# Altium PCB TP-SENSOR-15x10-CH-R01.PcbDoc (part 1 of 2)
Units mm, origin at the board's own origin, x right, y up, seen from the top; angles counter-clockwise.
Board outline 129.4 x 79.4 mm, 2 copper layers (Top Layer, Bottom Layer), stack 0.98 mm thick; 26 components, 26 nets, 61 pads, 358 vias.
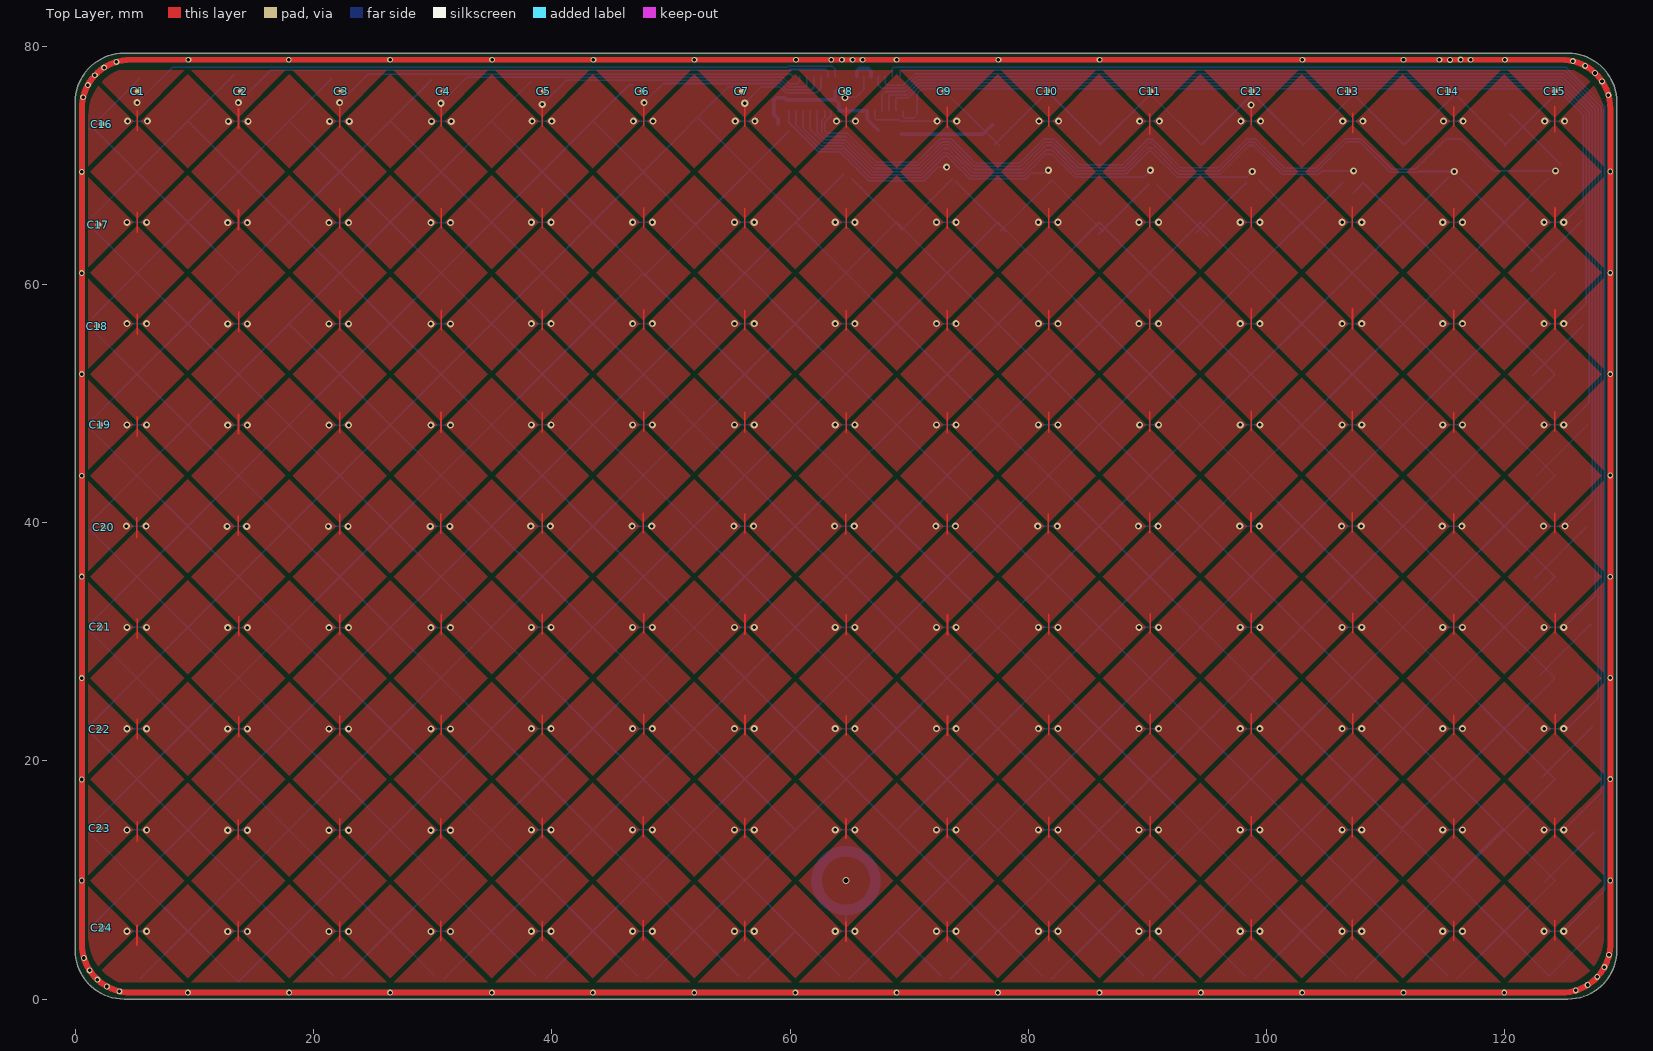
[diagram p0: Top Layer view]
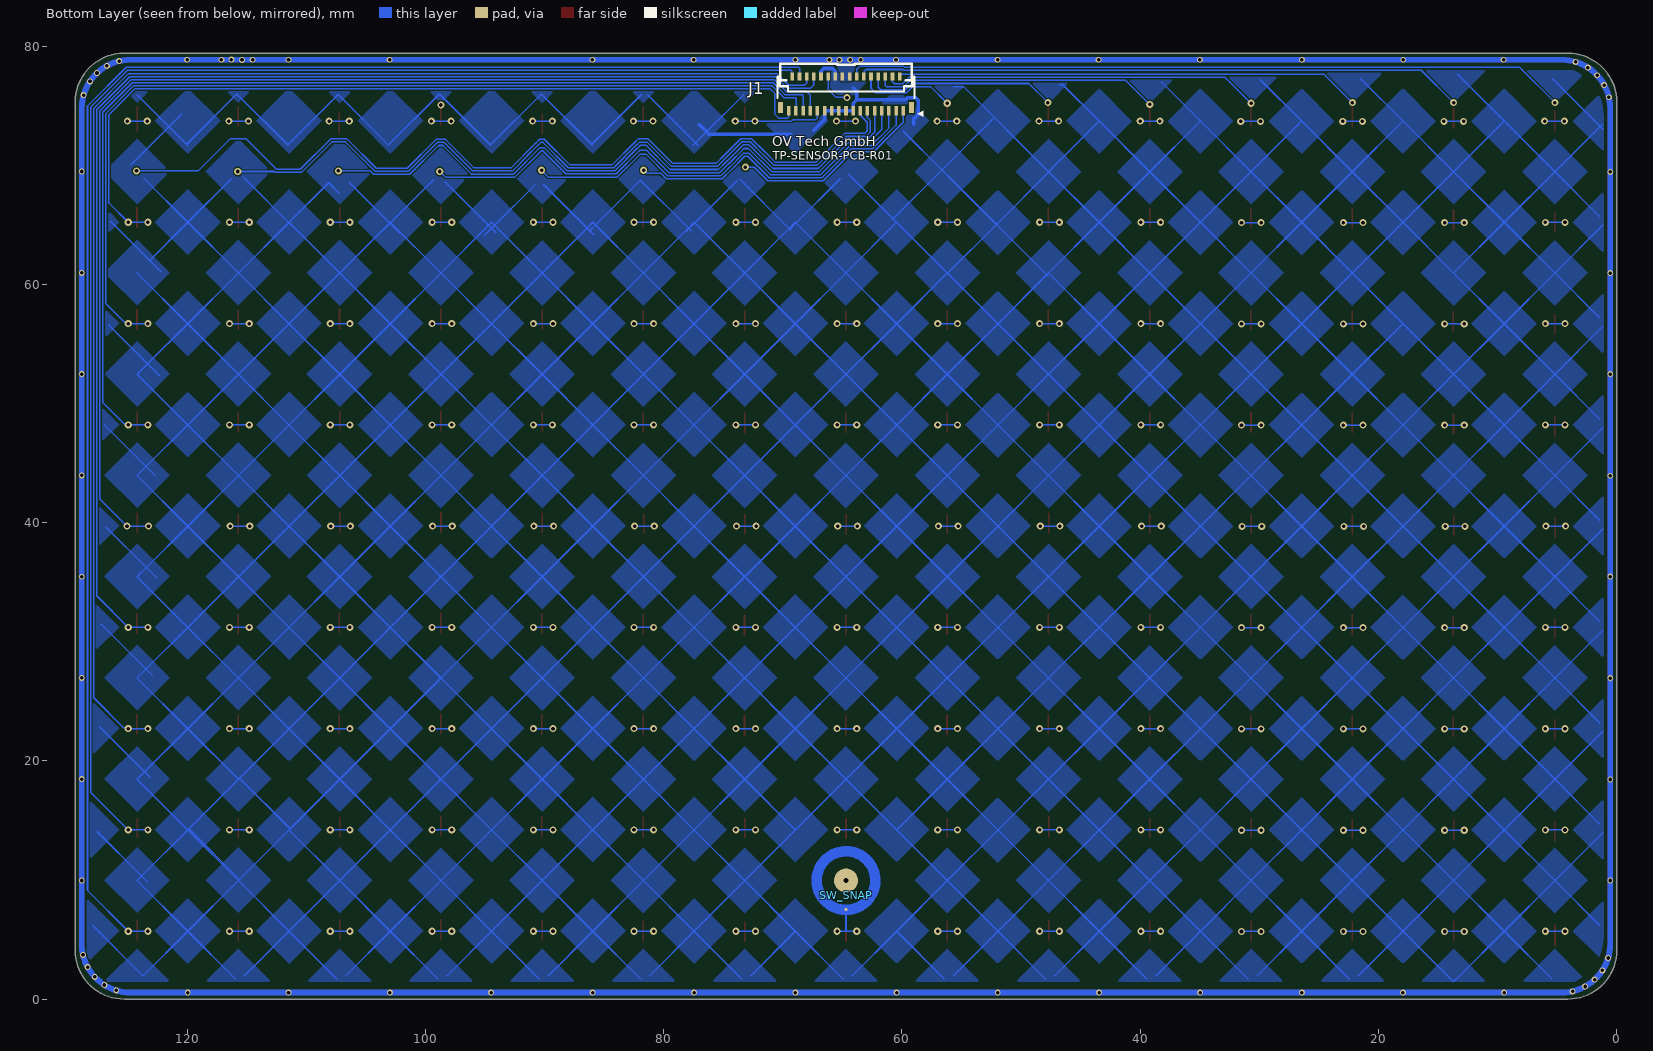
[diagram p1: Bottom Layer view, seen from below]

## Layer stack, top to bottom
Top Solder: solder mask 0.01, Solder Resist, Dk 3.8
Top Layer: signal copper 0.035
Core: core 0.91, 1.5mm 1/1OZ with copper(double-sided), Dk 4.6
Bottom Layer: signal copper 0.035
Bottom Solder: solder mask 0.01, Solder Resist, Dk 3.8

## Board outline
0,4.1 0,75.3 cw(c4.1,75.3) 4.1,79.4 125.3,79.4 cw(c125.3,75.3) 129.4,75.3 129.4,4.1 cw(c125.3,4.1) 125.3,0 4.1,0 cw(c4.1,4.1)

## Design rules (kind name [scope] priority, off if disabled: settings)
BoardOutlineClearance [All] p1: gap=0.289 ignorepadtopadclearanceinfootprint=FALSE
Clearance [All] p1: gap=0.127 ignorepadtopadclearanceinfootprint=TRUE except(0.15: SMDPad-Text THPad-Text Via-Text Fill-Text Poly-Text Region-Text Text-Text Text-Hole; 0.154: Arc-Via Track-Via SMDPad-Via; 0.2: Arc-SMDPad Arc-THPad Arc-Hole Track-SMDPad Track-THPad Track-Hole SMDPad-Hole THPad-Hole)
HoleSize HoleSize_Via [IsVia] p1: absolutevalues=TRUE maxlimit=6.3 minlimit=0.3 maxpercent=80.000 minpercent=20.000
HoleSize HoleSize_Pad [IsPad] p2: absolutevalues=TRUE maxlimit=6.3 minlimit=0.4 maxpercent=80.000 minpercent=20.000
HoleSize HoleSize_General [All] p3: absolutevalues=TRUE maxlimit=6.3 minlimit=0.3 maxpercent=80.000 minpercent=20.000
HoleToHoleClearance HoleToHoleClearance_Via [isVia] p1: gap=0.254 allowstackedmicrovias=TRUE
HoleToHoleClearance HoleToHoleClearance_General [All] p2: gap=0.5 allowstackedmicrovias=TRUE
MinimumAnnularRing MinimumAnnularRing_Pad [IsPad] p1: minimumring=0.25
MinimumAnnularRing MinimumAnnularRing_Via [IsVia] p2: minimumring=0.1
MinimumAnnularRing MinimumAnnularRing_General [not isVia] p3: minimumring=0.2
MinimumSolderMaskSliver [All] p1: minsoldermaskwidth=0.04
PolygonConnect [All] p1: connectstyle=Direct reliefconductorwidth=0.254 reliefentries=4 polygonreliefangle="90 Angle" airgapwidth=0.254
RoutingVias [All] p1: holewidth=0.3 width=0.5 viastyle="Through Hole" minholewidth=0.3 minwidth=0.5 maxholewidth=6.3 maxwidth=6.8
ShortCircuit ShortCircuit_inhibited [InPadClass(' Diamond Pads')] p1: allowed=TRUE
ShortCircuit ShortCircuit_1 [All] p2: allowed=FALSE
SilkToSilkClearance [All] p1: silktosilkclearance=0.15
SilkToSolderMaskClearance [IsPad] p1: minsilkscreentomaskgap=0.15 clearancetoexposedcopper=TRUE
SolderMaskExpansion [All] p1: expansion=0.038 istentingtop=FALSE
SupplyNets "Schematic Supply Nets_1" [InNet('GND')] p1: voltage=0.000
SupplyNets "Schematic Supply Nets" [InNet('EMI-GND')] p2: voltage=0.000
Width [All] p1: maxlimit=10 minlimit=0.127 preferedwidth=0.2
24 further rules are at their usual default settings.

## Components (designator, comment, footprint, x,y, rotation, side; value= is the part's Value field where it differs from the comment)
C1 "CAP_TRACKPAD_TX_CLM" CAP_TRACKPAD_TX_CLM 5.25,76.2 r0 top
C2 "CAP_TRACKPAD_TX_CLM" CAP_TRACKPAD_TX_CLM 13.9,76.2 r0 top
C3 "CAP_TRACKPAD_TX_CLM" CAP_TRACKPAD_TX_CLM 22.35,76.2 r0 top
C4 "CAP_TRACKPAD_TX_CLM" CAP_TRACKPAD_TX_CLM 30.9,76.2 r0 top
C5 "CAP_TRACKPAD_TX_CLM" CAP_TRACKPAD_TX_CLM 39.35,76.2 r0 top
C6 "CAP_TRACKPAD_TX_CLM" CAP_TRACKPAD_TX_CLM 47.6,76.2 r0 top
C7 "CAP_TRACKPAD_TX_CLM" CAP_TRACKPAD_TX_CLM 55.95,76.2 r0 top
C8 "CAP_TRACKPAD_TX_CLM" CAP_TRACKPAD_TX_CLM 64.7,76.2 r0 top
C9 "CAP_TRACKPAD_TX_CLM" CAP_TRACKPAD_TX_CLM 72.95,76.2 r0 top
C10 "CAP_TRACKPAD_TX_CLM" CAP_TRACKPAD_TX_CLM 81.6,76.2 r90 top
C11 "CAP_TRACKPAD_TX_CLM" CAP_TRACKPAD_TX_CLM 90.25,76.2 r90 top
C12 "CAP_TRACKPAD_TX_CLM" CAP_TRACKPAD_TX_CLM 98.75,76.2 r90 top
C13 "CAP_TRACKPAD_TX_CLM" CAP_TRACKPAD_TX_CLM 106.85,76.2 r90 top
C14 "CAP_TRACKPAD_TX_CLM" CAP_TRACKPAD_TX_CLM 115.25,76.2 r90 top
C15 "CAP_TRACKPAD_TX_CLM" CAP_TRACKPAD_TX_CLM 124.2,76.2 r90 top
C16 "CAP_TRACKPAD_RX_ROW" CAP_TRACKPAD_RX_ROW 2.25,73.45 r180 top
C17 "CAP_TRACKPAD_RX_ROW" CAP_TRACKPAD_RX_ROW 1.95,65 r180 top
C18 "CAP_TRACKPAD_RX_ROW" CAP_TRACKPAD_RX_ROW 1.85,56.5 r180 top
C19 "CAP_TRACKPAD_RX_ROW" CAP_TRACKPAD_RX_ROW 2.1,48.2 r180 top
C20 "CAP_TRACKPAD_RX_ROW" CAP_TRACKPAD_RX_ROW 2.4,39.6 r180 top
C21 "CAP_TRACKPAD_RX_ROW" CAP_TRACKPAD_RX_ROW 2.1,31.25 r180 top
C22 "CAP_TRACKPAD_RX_ROW" CAP_TRACKPAD_RX_ROW 2.05,22.65 r180 top
C23 "CAP_TRACKPAD_RX_ROW" CAP_TRACKPAD_RX_ROW 2.05,14.35 r180 top
C24 "CAP_TRACKPAD_RX_ROW" CAP_TRACKPAD_RX_ROW 2.25,6 r180 top
J1 "FH35C-33S-0.3SHW" "FFC 33pol 0.3mm FH35C-33S-0.3SHW" 64.7,76.05 r180 bottom
SW_SNAP "RCG05200N" SNAPDOME_RCG05200N 64.7,9.954 r180 bottom

## Footprints (in the part's own frame and the unit in brackets; to place one, negate y for a bottom-side part, rotate by r counter-clockwise, add the part's x,y. Pads: shape width x height; smd on the part's side, far side on the other; paste and mask are expansions set on the pad)
CAP_TRACKPAD_RX_ROW [mm]
  round 0.5 smd mask+0: RX_ROW(0,0)
CAP_TRACKPAD_TX_CLM [mm]
  round 0.5 smd mask+0: TX_CLM(0,0)
"FFC 33pol 0.3mm FH35C-33S-0.3SHW" [mm] "FFC 33pol 0.3mm FH35C-33S-0.3SHW"
  rect 0.3x0.8 smd: 1(4.8,-1.484) 3(4.2,-1.484) 5(3.6,-1.484) 7(3,-1.484) 9(2.4,-1.484) 11(1.8,-1.484) 13(1.2,-1.484) 15(0.6,-1.484) 17(0,-1.484) 19(-0.6,-1.484) 21(-1.2,-1.484) 23(-1.8,-1.484) 25(-2.4,-1.484) 27(-3,-1.484) 29(-3.6,-1.484) 31(-4.2,-1.484) 33(-4.8,-1.484)
  rect 0.3x0.65 smd: 2(4.5,1.391) 4(3.9,1.391) 6(3.3,1.391) 8(2.7,1.391) 10(2.1,1.391) 12(1.5,1.391) 14(0.9,1.391) 16(0.3,1.391) 18(-0.3,1.391) 20(-0.9,1.391) 22(-1.5,1.391) 24(-2.1,1.391) 26(-2.7,1.391) 28(-3.3,1.391) 30(-3.9,1.391) 32(-4.5,1.391)
  rect 0.4x0.95 smd: MT(-5.5,-1.209) MT(5.5,-1.209)
  silkscreen extent -5.75,-1.97 6.5,2.47, body extent -5.75,-1.73 5.75,2.47, height 0.9
SNAPDOME_RCG05200N [mm] "Snaptron RCG05200N snapdome with 5.3mm diameter"
  round 0.25 smd mask+0: 1(0,-2.43)
  round 2.03 smd mask+0: 2(0,0)
  Top Layer lines w0.88: 0,-2.462 cw(c0,0) -1.208,-2.145 cw(c0,0) -2.145,-1.208 cw(c0,0) -2.462,0 cw(c0,0) 0,-2.462
  body extent -2.24,-2.24 2.24,2.24, height 0.33

## Part data
C1 C2 C3 C4 C5 C6 C7 C8 C9 C10 C11 C12 C13 C14 C15 C16 C17 C18 C19 C20 C21 C22 C23 C24: "Single trackpad sensor element within a square of 8.5x8.5mm"
J1: library part "FFC Connector_33pol_FH35C-33S-0.3SHW", "FFC Connector 33pol 0.3mm Pitch Double Sided Contacts", Manufacturer 1="Hirose Connector", Manufacturer 1 Prt. Nr.=FH35C-33S-0.3SHW(99)
SW_SNAP: library part SW_SNAPDOME_RCG05200N_5.3mm, "RCG-Series Tactile Domes 5.3mm", Manufacturer 1="Snaptron Inc", Manufacturer 1 Prt. Nr.=RCG05200N

## Via types
v1: diameter 0.6, hole 0.3, Top Layer to Bottom Layer, tented both sides, 286 vias
v2: diameter 0.5, hole 0.3, Top Layer to Bottom Layer, tented both sides, 71 vias
v3: diameter 0.6, hole 0.4, Top Layer to Bottom Layer, tented top, 1 vias

## Nets (pads, with @x,y where several pads share a name; then routed paths per layer and width w, separated by ;. In a path a pad name is that pad's centre, name@x,y a point inside that pad or via, vN(x,y) a via of type N, cw(c..) or ccw(c..) an arc to the next point about the centre after c; other vN are vias at no path point)
EMI-GND: J1.16 J1.18 | length 971.9
  Top Layer w0.5: 0.557,4.64 0.557,74.75 cw(c4.657,74.75) 4.657,78.85 ; 0.557,4.65 ccw(c4.657,4.65) 4.657,0.55 ; 0.56,4.64 0.56,74.75 cw(c4.66,74.75) 4.66,78.85 v2(9.507,78.85) v2(17.927,78.85) v2(26.436,78.85) v2(34.994,78.85) v2(43.495,78.85) v2(51.971,78.85) v2(60.505,78.85) v2(68.949,78.85) v2(77.491,78.85) v2(85.984,78.85) v2(103.002,78.85) v2(111.495,78.85) v2(114.5,78.85) 115.392,78.85 v2(115.397,78.846) 115.401,78.85 v2@116.297,78.85 ; 0.56,4.65 ccw(c4.66,4.65) 4.66,0.55 v2(85.973,0.55) 119.9,0.55 120,0.55 124.76,0.55 ccw(c124.76,4.65) 128.857,4.484 128.857,74.75 128.86,74.75 ccw(c124.76,74.75) 124.76,78.85 v2(117.135,78.85) ; v2@116.297,78.85 v2(117.135,78.85)
  Bottom Layer w0.5: 0.55,4.64 0.55,74.75 cw(c4.65,74.75) 4.65,78.85 v2(9.507,78.85) v2(17.927,78.85) v2(26.436,78.85) v2(34.994,78.85) v2(43.495,78.85) v2(51.971,78.85) v2(60.505,78.85) v2(68.949,78.85) v2(77.491,78.85) v2(85.984,78.85) v2(103.002,78.85) v2(111.495,78.85) v2(114.5,78.85) 115.392,78.85 v2(115.397,78.846) 115.401,78.85 v2@116.297,78.85 ; 0.55,4.65 ccw(c4.65,4.65) 4.65,0.55 ; 0.553,4.64 0.553,74.75 ; 0.553,4.65 ccw(c4.653,4.65) 4.653,0.55 v2(85.973,0.55) 119.9,0.55 120,0.55 124.75,0.55 ccw(c124.75,4.65) 128.847,4.484 v2(128.847,9.961) v2(128.847,18.468) v2(128.847,26.974) v2(128.847,35.453) v2(128.847,43.959) v2(128.847,52.465) v2(128.847,60.962) v2(128.847,69.468) 128.847,74.771 ccw(c124.768,74.771) 124.768,78.85 v2(119.996,78.85) v2(117.135,78.85) ; v2@116.297,78.85 v2(117.135,78.85)
  other v2: 102.982,0.541 9.458,0.55 17.965,0.55 26.442,0.55 34.969,0.55 43.451,0.55 51.962,0.55 60.454,0.55 68.951,0.55 77.448,0.55 94.486,0.55 111.493,0.55 119.95,0.55 3.712,0.659 125.952,0.73 2.662,1.064 126.942,1.185 1.867,1.639 127.757,1.863 1.214,2.418 128.347,2.682 0.73,3.454 128.744,3.722 0.553,9.958 0.553,18.434 0.553,26.941 0.553,35.461 0.553,43.933 0.553,52.456 0.553,60.938 0.553,69.443 0.663,75.701 128.694,75.876 1.058,76.726 128.157,77.04 1.653,77.549 127.57,77.735 2.423,78.195 126.736,78.344 3.461,78.674 125.711,78.738 63.463,78.85 64.36,78.85 65.26,78.85 66.098,78.85 116.297,78.851
GND: J1.15 J1.17 J1.19 J1.20 J1.21 J1.23 J1.24 | length 3052.4
  Bottom Layer w0.13: 1.142,72.997 1.398,73.252 ; 1.2,13.95 5.2,9.95 ; 1.2,22.45 5.2,18.45 ; 1.2,30.95 5.2,26.95 ; 1.2,39.45 5.2,35.45 ; 1.2,47.95 5.2,43.95 ; 1.2,56.45 5.2,52.45 ; 1.2,64.95 5.2,60.95 ; 1.2,73.45 1.398,73.252 ; 1.45,6.2 5.2,9.95 ; 1.45,14.7 5.2,18.45 ; 1.45,23.2 5.2,26.95 ; 1.45,31.7 5.2,35.45 ; 1.45,40.2 5.2,43.95 ; 1.45,48.7 5.2,52.45 ; 1.45,57.2 5.2,60.95 ; 1.45,65.7 5.2,69.45 ; 5.392,77.247 1.398,73.252 ; 5.45,1.7 9.45,5.7 ; 9.45,73.7 13.7,69.45 ; 13.375,77.625 5.2,69.45 ; 13.95,1.7 17.95,5.7 ; 21.55,77.3 17.95,73.7 ; 21.7,1.95 17.95,5.7 ; 22.45,1.7 26.45,5.7 ; 29.925,77.175 26.45,73.7 ; 30.2,1.95 26.45,5.7 ; 30.95,1.7 34.95,5.7 ; 38.225,76.975 34.95,73.7 ; 38.7,1.95 34.95,5.7 ; 39.45,1.7 43.45,5.7 ; 46.8,76.75 46.5,76.75 43.45,73.7 ; 47.2,1.95 43.45,5.7 ; 47.708,60.659 56.208,69.159 ; 47.741,69.358 51.991,65.108 52.074,65.025 56.175,60.925 ; 47.95,1.7 51.95,5.7 ; 52.359,73.892 56.609,69.642 ; 55.642,68.591 56.651,69.6 ; 55.7,1.95 51.95,5.7 ; 55.7,76.598 54.848,76.598 47.7,69.45 ; 56.241,60.858 56.175,60.925 ; 56.45,1.7 60.45,5.7 ; 56.559,69.692 56.651,69.6 ; 59.892,72.841 56.651,69.6 ; 60.242,64.991 60.751,65.5 ; 60.425,65.175 56.2,60.95 ; 60.45,65.2 64.7,60.95 ; 60.809,65.442 60.751,65.5 ; 64.2,1.95 60.45,5.7 ; 64.492,69.241 60.751,65.5 ; 64.95,1.7 68.95,5.7 ; 65.191,68.858 68.9,65.15 ; 69.358,64.559 69.424,64.625 ; 69.441,64.608 69.424,64.625 ; 72.7,1.95 68.95,5.7 ; 73.309,75.892 76.4,72.8 77.325,71.876 ; 73.45,1.7 77.45,5.7 ; 73.608,68.809 69.475,64.675 ; 73.859,68.692 77.4,65.15 77.876,64.675 78.109,64.442 ; 77.108,71.659 77.325,71.876 ; 77.559,71.642 77.325,71.876 ; 77.692,64.491 77.925,64.725 ; 81.2,1.95 77.45,5.7 ; 81.358,75.909 77.325,71.876 ; 81.841,75.958 86.05,71.749 ; 81.942,68.741 77.925,64.725 ; 81.95,1.7 85.95,5.7 ; 81.991,68.708 85.725,64.975 86.199,64.5 ; 85.858,64.159 86.199,64.5 ; 85.992,71.691 86.05,71.749 ; 86.091,71.708 86.05,71.749 ; 86.241,64.458 86.199,64.5 ; 89.7,1.95 85.95,5.7 ; 90.108,68.409 86.199,64.5 ; 90.242,75.941 86.05,71.749 ; 90.309,75.942 94.559,71.692 ; 90.45,1.7 94.45,5.7 ; 90.809,68.342 94.2,64.95 94.451,64.7 95.059,64.092 ; 94.092,64.341 94.7,64.95 ; 94.558,71.709 98.808,75.959 ; 98.2,1.95 94.45,5.7 ; 98.342,68.591 94.7,64.95 ; 98.841,75.958 103.091,71.708 ; 98.95,1.7 102.95,5.7 ; 99.341,68.758 102.925,65.175 ; 102.158,64.309 106.408,68.559 ; 103.092,71.691 107.326,75.925 ; 103.591,64.508 102.974,65.125 102.925,65.175 ; 106.7,1.95 102.95,5.7 ; 107.25,67.65 108.125,68.525 111.45,65.2 ; 107.309,75.942 107.326,75.925 ; 107.342,75.941 107.326,75.925 ; 107.45,1.7 111.45,5.7 ; 111.158,64.859 115.3,69 ; 111.559,71.692 107.326,75.925 ; 111.558,71.709 115.808,75.959 ; 115.2,1.95 111.45,5.7 ; 115.791,76.008 120.041,71.758 ; 115.95,1.7 119.95,5.7 ; 116.309,68.842 119.95,65.2 ; 119.942,71.641 124.192,75.891 ; 120.459,74.292 121.526,73.225 124.709,70.042 ; 120.559,64.592 119.95,65.2 ; 122.192,61.047 123.148,62.002 ; 122.342,52.347 123.323,53.327 ; 122.542,35.347 123.423,36.227 ; 122.692,43.947 123.448,44.702 ; 122.942,27.197 123.448,27.702 ; 123.092,18.597 123.573,19.077 ; 123.292,9.797 123.823,10.327 ; 123.622,68.872 119.95,65.2 ; 124.2,60.95 119.95,56.7 ; 126.442,65.297 123.148,62.002 ; 126.592,56.597 123.323,53.327 ; 126.792,39.597 123.423,36.227 ; 126.942,48.197 123.448,44.702 ; 127.192,31.447 123.448,27.702 ; 127.342,22.847 123.573,19.077 ; 127.542,14.047 123.823,10.327 ; 127.942,6.197 123.698,1.952 119.95,5.7 ; 1.398,73.252 5.2,69.45 ; 5.2,9.95 9.45,14.2 ; 5.2,9.95 9.45,5.7 ; 5.2,18.45 9.45,22.7 ; 5.2,18.45 9.45,14.2 ; 5.2,26.95 9.45,31.2 ; 5.2,26.95 9.45,22.7 ; 5.2,35.45 9.45,31.2 ; 5.2,35.45 9.45,39.7 ; 5.2,43.95 9.45,48.2 ; 5.2,43.95 9.45,39.7 ; 5.2,52.45 9.45,56.7 ; 5.2,52.45 9.45,48.2 ; 5.2,60.95 9.45,65.2 ; 5.2,60.95 9.45,56.7 ; 5.2,69.45 9.45,65.2 ; 9.45,5.7 13.2,1.95 13.7,1.45 17.95,5.7 ; 9.45,5.7 13.7,9.95 ; 9.45,14.2 13.7,9.95 ; 9.45,14.2 13.7,18.45 ; 9.45,22.7 13.7,18.45 ; 9.45,22.7 13.7,26.95 ; 9.45,31.2 13.7,35.45 ; 9.45,31.2 13.7,26.95 ; 9.45,39.7 13.7,43.95 ; 9.45,39.7 13.7,35.45 ; 9.45,48.2 13.7,43.95 ; 9.45,48.2 13.7,52.45 ; 9.45,56.7 13.7,60.95 ; 9.45,56.7 13.7,52.45 ; 9.45,65.2 13.7,60.95 ; 9.45,65.2 13.7,69.45 ; 13.7,9.95 17.95,5.7 ; 13.7,9.95 17.95,14.2 ; 13.7,18.45 17.95,22.7 ; 13.7,18.45 17.95,14.2 ; 13.7,26.95 17.95,31.2 ; 13.7,26.95 17.95,22.7 ; 13.7,35.45 17.95,31.2 ; 13.7,35.45 17.95,39.7 ; 13.7,43.95 17.95,39.7 ; 13.7,43.95 17.95,48.2 ; 13.7,52.45 17.95,56.7 ; 13.7,52.45 17.95,48.2 ; 13.7,60.95 17.95,65.2 ; 13.7,69.45 17.95,65.2 ; 13.7,69.45 17.95,73.7 ; 17.95,5.7 22.2,9.95 ; 17.95,14.2 22.2,18.45 ; 17.95,14.2 22.2,9.95 ; 17.95,22.7 22.2,26.95 ; 17.95,22.7 22.2,18.45 ; 17.95,31.2 22.2,35.45 ; 17.95,31.2 22.2,26.95 ; 17.95,39.7 22.2,35.45 ; 17.95,39.7 22.2,43.95 ; 17.95,48.2 22.2,43.95 ; 17.95,48.2 22.2,52.45 ; 17.95,56.7 22.2,60.95 ; 17.95,56.7 22.2,52.45 ; 17.95,65.2 22.2,60.95 ; 17.95,65.2 22.2,69.45 ; 17.95,73.7 22.2,69.45 ; 22.2,9.95 26.45,14.2 ; 22.2,9.95 26.45,14.2 ; 22.2,9.95 26.45,5.7 ; 22.2,18.45 26.45,14.2 ; 22.2,18.45 26.45,22.7 ; 22.2,26.95 26.45,22.7 ; 22.2,26.95 26.45,31.2 ; 22.2,35.45 26.45,31.2 ; 22.2,35.45 26.45,39.7 ; 22.2,43.95 26.45,48.2 ; 22.2,43.95 26.45,39.7 ; 22.2,52.45 26.45,56.7 ; 22.2,52.45 26.45,48.2 ; 22.2,60.95 26.45,65.2 ; 22.2,60.95 26.45,56.7 ; 22.2,69.45 26.45,65.2 ; 22.2,69.45 26.45,73.7 ; 26.45,5.7 30.7,9.95 ; 26.45,14.2 30.7,18.45 ; 26.45,14.2 30.7,9.95 ; 26.45,22.7 30.7,26.95 ; 26.45,22.7 30.7,18.45 ; 26.45,31.2 30.7,35.45 ; 26.45,31.2 30.7,26.95 ; 26.45,39.7 30.7,35.45 ; 26.45,39.7 30.7,43.95 ; 26.45,48.2 30.7,43.95 ; 26.45,48.2 30.7,52.45 ; 26.45,56.7 30.7,52.45 ; 26.45,56.7 30.7,60.95 ; 26.45,65.2 30.7,60.95 ; 26.45,65.2 30.7,69.45 ; 26.45,73.7 30.7,69.45 ; 30.7,9.95 34.95,5.7 ; 30.7,9.95 34.95,14.2 ; 30.7,18.45 34.95,22.7 ; 30.7,18.45 34.95,14.2 ; 30.7,18.45 34.95,22.7 ; 30.7,26.95 34.95,22.7 ; 30.7,26.95 34.95,31.2 ; 30.7,35.45 34.95,31.2 ; 30.7,35.45 34.95,39.7 ; 30.7,43.95 34.95,39.7 ; 30.7,43.95 34.95,48.2 ; 30.7,52.45 34.95,48.2 ; 30.7,52.45 34.95,56.7 ; 30.7,60.95 34.95,65.2 ; 30.7,60.95 34.95,56.7 ; 30.7,69.45 34.95,65.2 ; 30.7,69.45 34.95,73.7 ; 34.95,5.7 39.2,9.95 ; 34.95,14.2 39.2,9.95 ; 34.95,14.2 39.2,18.45 ; 34.95,22.7 39.2,18.45 ; 34.95,22.7 39.2,26.95 ; 34.95,31.2 39.2,26.95 ; 34.95,31.2 39.2,35.45 ; 34.95,39.7 39.2,35.45 ; 34.95,39.7 39.2,43.95 ; 34.95,48.2 39.2,43.95 ; 34.95,48.2 39.2,52.45 ; 34.95,56.7 39.2,52.45 ; 34.95,56.7 39.2,60.95 ; 34.95,65.2 39.2,60.95 ; 34.95,65.2 39.2,69.45 ; 34.95,73.7 39.2,69.45 ; 39.2,9.95 43.45,14.2 ; 39.2,9.95 43.45,5.7 ; 39.2,18.45 43.45,22.7 ; 39.2,18.45 43.45,14.2 ; 39.2,26.95 43.45,31.2 ; 39.2,26.95 43.45,22.7 ; 39.2,35.45 43.45,39.7 ; 39.2,35.45 43.45,31.2 ; 39.2,43.95 43.45,48.2 ; 39.2,43.95 43.45,39.7 ; 39.2,52.45 43.45,48.2 ; 39.2,52.45 43.45,56.7 ; 39.2,60.95 43.45,65.2 ; 39.2,60.95 43.45,56.7 ; 39.2,69.45 43.45,65.2 ; 39.2,69.45 43.45,73.7 ; 43.45,5.7 47.7,9.95 ; 43.45,14.2 47.7,9.95 ; 43.45,14.2 47.7,18.45 ; 43.45,22.7 47.7,18.45 ; 43.45,22.7 47.7,26.95 ; 43.45,31.2 47.7,26.95 ; 43.45,31.2 47.7,35.45 ; 43.45,31.2 47.7,35.45 ; 43.45,39.7 47.7,35.45 ; 43.45,39.7 47.7,43.95 ; 43.45,48.2 47.7,43.95 ; 43.45,48.2 47.7,52.45 ; 43.45,56.7 47.7,52.45 ; 43.45,56.7 47.7,60.95 ; 43.45,65.2 47.7,60.95 ; 43.45,65.2 47.7,69.45 ; 43.45,73.7 47.7,69.45 ; 47.7,9.95 51.95,14.2 ; 47.7,9.95 51.95,5.7 ; 47.7,18.45 51.95,22.7 ; 47.7,18.45 51.95,14.2 ; 47.7,26.95 51.95,31.2 ; 47.7,26.95 51.95,22.7 ; 47.7,35.45 51.95,39.7 ; 47.7,35.45 51.95,31.2 ; 47.7,43.95 51.95,48.2 ; 47.7,43.95 51.95,39.7 ; 47.7,52.45 51.95,48.2 ; 47.7,52.45 51.95,56.7 ; 47.7,60.95 47.85,60.8 51.95,56.7 ; 51.95,5.7 56.2,9.95 ; 51.95,14.2 56.2,18.45 ; 51.95,14.2 56.2,9.95 ; 51.95,22.7 56.2,26.95 ; 51.95,22.7 56.2,18.45 ; 51.95,31.2 56.2,26.95 ; 51.95,31.2 56.2,35.45 ; 51.95,39.7 56.2,35.45 ; 51.95,39.7 56.2,43.95 ; 51.95,39.7 56.2,43.95 ; 51.95,48.2 56.2,43.95 ; 51.95,48.2 56.2,52.45 ; 51.95,56.7 56.175,60.925 ; 51.95,56.7 56.2,52.45 ; 56.175,60.925 56.2,60.95 ; 56.2,9.95 60.45,14.2 ; 56.2,9.95 60.45,5.7 ; 56.2,18.45 60.45,14.2 ; 56.2,18.45 60.45,22.7 ; 56.2,26.95 60.45,22.7 ; 56.2,26.95 60.45,31.2 ; 56.2,35.45 60.45,39.7 ; 56.2,35.45 60.45,31.2 ; 56.2,43.95 60.45,48.2 ; 56.2,43.95 60.45,39.7 ; 56.2,52.45 60.45,48.2 ; 56.2,52.45 60.45,56.7 ; 56.2,60.95 60.45,56.7 ; 56.651,69.6 60.751,65.5 ; 60.45,14.2 64.7,18.45 ; 60.45,22.7 64.7,26.95 ; 60.45,22.7 64.7,18.45 ; 60.45,31.2 64.7,35.45 ; 60.45,31.2 64.7,26.95 ; 60.45,39.7 64.7,35.45 ; 60.45,39.7 64.7,43.95 ; 60.45,48.2 64.7,52.45 ; 60.45,48.2 64.7,43.95 ; 60.45,48.2 64.7,52.45 ; 60.45,56.7 64.7,52.45 ; 60.45,56.7 64.7,60.95 ; 64.7,18.45 68.95,14.2 ; 64.7,18.45 68.95,22.7 ; 64.7,26.95 68.95,22.7 ; 64.7,26.95 68.95,31.2 ; 64.7,35.45 68.95,31.2 ; 64.7,35.45 68.95,39.7 ; 64.7,43.95 68.95,48.2 ; 64.7,43.95 68.95,39.7 ; 64.7,52.45 68.95,56.7 ; 64.7,52.45 68.95,48.2 ; 64.7,60.95 68.9,65.15 ; 64.7,60.95 68.95,56.7 ; 68.9,65.15 69.424,64.625 ; 68.9,65.15 68.95,65.2 69.475,64.675 ; 68.95,5.7 73.2,9.95 ; 68.95,14.2 73.2,18.45 ; 68.95,14.2 73.2,9.95 ; 68.95,22.7 73.2,18.45 ; 68.95,22.7 73.2,26.95 ; 68.95,31.2 73.2,35.45 ; 68.95,31.2 73.2,26.95 ; 68.95,39.7 73.2,43.95 ; 68.95,39.7 73.2,35.45 ; 68.95,48.2 73.2,52.45 ; 68.95,48.2 73.2,43.95 ; 68.95,56.7 73.2,52.45 ; 68.95,56.7 73.2,60.95 ; 69.424,64.625 69.475,64.675 ; 69.475,64.675 73.2,60.95 ; 73.2,9.95 77.45,5.7 ; 73.2,9.95 77.45,14.2 ; 73.2,18.45 77.45,14.2 ; 73.2,18.45 77.45,22.7 ; 73.2,26.95 77.45,22.7 ; 73.2,26.95 77.45,31.2 ; 73.2,35.45 77.45,31.2 ; 73.2,35.45 77.45,39.7 ; 73.2,43.95 77.45,39.7 ; 73.2,43.95 77.45,48.2 ; 73.2,52.45 77.45,48.2 ; 73.2,52.45 77.45,56.7 ; 73.2,60.95 77.45,65.2 77.925,64.725 ; 73.2,60.95 77.45,56.7 ; 77.45,5.7 81.7,9.95 ; 77.45,14.2 81.7,18.45 ; 77.45,14.2 81.7,9.95 ; 77.45,22.7 81.7,18.45 ; 77.45,22.7 81.7,26.95 ; 77.45,31.2 81.7,26.95 ; 77.45,31.2 81.7,35.45 ; 77.45,39.7 81.7,43.95 ; 77.45,39.7 81.7,35.45 ; 77.45,48.2 81.7,52.45 ; 77.45,48.2 81.7,43.95 ; 77.45,56.7 81.7,52.45 ; 77.45,56.7 81.7,60.95 ; 77.925,64.725 81.7,60.95 ; 81.7,9.95 85.95,5.7 ; 81.7,9.95 85.95,14.2 ; 81.7,18.45 85.95,14.2 ; 81.7,18.45 85.95,22.7 ; 81.7,26.95 85.95,31.2 ; 81.7,26.95 85.95,22.7 ; 81.7,35.45 85.95,31.2 ; 81.7,35.45 85.95,39.7 ; 81.7,43.95 85.95,39.7 ; 81.7,43.95 85.95,48.2 ; 81.7,52.45 85.95,48.2 ; 81.7,52.45 85.95,56.7 ; 81.7,60.95 85.95,65.2 86.425,64.725 90.2,60.95 ; 81.7,60.95 85.95,56.7 ; 85.95,5.7 90.2,9.95 ; 85.95,14.2 90.2,9.95 ; 85.95,14.2 90.2,18.45 ; 85.95,22.7 90.2,26.95 ; 85.95,22.7 90.2,18.45 ; 85.95,31.2 90.2,26.95 ; 85.95,31.2 90.2,35.45 ; 85.95,39.7 90.2,43.95 ; 85.95,39.7 90.2,35.45 ; 85.95,48.2 90.2,52.45 ; 85.95,48.2 90.2,43.95 ; 85.95,56.7 90.2,52.45 ; 85.95,56.7 90.2,60.95 ; 90.2,9.95 94.45,5.7 ; 90.2,9.95 94.45,14.2 ; 90.2,18.45 94.45,14.2 ; 90.2,18.45 94.45,22.7 ; 90.2,26.95 94.45,22.7 ; 90.2,26.95 94.45,31.2 ; 90.2,35.45 94.45,31.2 ; 90.2,35.45 94.45,39.7 ; 90.2,43.95 94.45,39.7 ; 90.2,43.95 94.45,48.2 ; 90.2,52.45 94.45,48.2 ; 90.2,52.45 94.45,56.7 ; 90.2,60.95 94.45,65.2 94.7,64.95 ; 90.2,60.95 94.45,56.7 ; 94.45,5.7 98.7,9.95 ; 94.45,14.2 98.7,18.45 ; 94.45,14.2 98.7,9.95 ; 94.45,22.7 98.7,18.45 ; 94.45,22.7 98.7,26.95 ; 94.45,31.2 98.7,26.95 ; 94.45,31.2 98.7,35.45 ; 94.45,39.7 98.7,43.95 ; 94.45,39.7 98.7,35.45 ; 94.45,48.2 98.7,52.45 ; 94.45,48.2 98.7,43.95 ; 94.45,56.7 98.7,52.45 ; 94.45,56.7 98.7,60.95 ; 94.7,64.95 98.7,60.95 ; 98.7,9.95 102.95,14.2 ; 98.7,9.95 102.95,5.7 ; 98.7,18.45 98.763,18.513 ; 98.7,26.95 98.763,27.013 ; 98.7,26.95 98.749,26.901 ; 98.7,35.45 98.763,35.513 ; 98.7,35.45 98.749,35.401 ; 98.7,43.95 102.95,39.7 ; 98.7,43.95 102.95,48.2 ; 98.7,52.45 102.95,48.2 ; 98.7,52.45 102.95,48.2 ; 98.7,52.45 102.95,56.7 ; 98.7,60.95 102.925,65.175 ; 98.7,60.95 102.95,56.7 ; 98.749,26.901 98.811,26.964 98.763,27.013 ; 98.749,26.901 102.95,22.7 ; 98.749,35.401 102.95,31.2 ; 98.749,35.401 98.811,35.464 98.763,35.513 ; 98.763,18.513 102.95,22.7 ; 98.763,18.513 98.811,18.464 98.749,18.401 102.95,14.2 ; 98.763,27.013 102.95,31.2 ; 98.763,35.513 102.95,39.7 ; 102.925,65.175 102.95,65.2 103,65.15 107.2,60.95 ; 102.95,5.7 107.2,9.95 ; 102.95,14.2 107.2,9.95 ; 102.95,14.2 107.2,18.45 ; 102.95,22.7 107.2,18.45 ; 102.95,22.7 107.2,26.95 ; 102.95,31.2 107.2,35.45 ; 102.95,31.2 107.2,26.95 ; 102.95,39.7 107.2,35.45 ; 102.95,39.7 107.2,43.95 ; 102.95,48.2 107.2,43.95 ; 102.95,48.2 107.2,52.45 ; 102.95,56.7 107.2,60.95 ; 102.95,56.7 107.2,52.45 ; 107.2,9.95 111.45,5.7 ; 107.2,9.95 111.45,14.2 ; 107.2,18.45 111.352,14.298 ; 107.2,18.45 111.45,22.7 ; 107.2,26.95 111.45,31.2 ; 107.2,26.95 111.45,22.7 ; 107.2,35.45 111.45,39.7 ; 107.2,35.45 111.45,31.2 ; 107.2,43.95 111.45,39.7 ; 107.2,43.95 111.45,48.2 ; 107.2,52.45 111.45,48.2 ; 107.2,52.45 111.45,56.7 ; 107.2,60.95 111.45,65.2 ; 107.2,60.95 111.45,56.7 ; 111.352,14.298 111.45,14.2 ; 111.352,14.298 115.602,18.548 ; 111.45,5.7 115.7,9.95 ; 111.45,14.2 115.602,10.048 119.852,14.298 ; 111.45,22.7 115.602,18.548 ; 111.45,22.7 115.7,26.95 ; 111.45,31.2 115.7,35.45 ; 111.45,31.2 115.7,26.95 ; 111.45,39.7 115.7,35.45 ; 111.45,39.7 115.7,43.95 ; 111.45,48.2 115.7,52.45 ; 111.45,48.2 115.7,43.95 ; 111.45,48.2 115.7,52.45 ; 111.45,56.7 115.7,60.95 ; 111.45,56.7 115.7,52.45 ; 111.45,65.2 111.475,65.175 115.7,60.95 ; 115.602,18.548 115.7,18.45 ; 115.7,9.95 119.95,14.2 ; 115.7,9.95 119.95,5.7 ; 115.7,18.45 119.852,14.298 ; 115.7,18.45 119.95,22.7 ; 115.7,26.95 119.95,31.2 ; 115.7,26.95 119.95,22.7 ; 115.7,35.45 119.95,39.7 ; 115.7,35.45 119.95,31.2 ; 115.7,43.95 119.95,39.7 ; 115.7,43.95 119.95,48.2 ; 115.7,52.45 119.95,48.2 ; 115.7,52.45 119.95,56.7 ; 115.7,60.95 119.95,65.2 ; 115.7,60.95 119.95,56.7 ; 119.852,14.298 119.95,14.2 ; 119.95,5.7 124.2,9.95 123.823,10.327 ; 119.95,14.2 123.823,10.327 ; 119.95,14.2 124.2,18.45 123.573,19.077 ; 119.95,22.7 123.573,19.077 ; 119.95,22.7 124.2,26.95 123.448,27.702 ; 119.95,31.2 123.448,27.702 ; 119.95,31.2 124.2,35.45 123.423,36.227 ; 119.95,39.7 124.2,43.95 123.448,44.702 ; 119.95,39.7 123.423,36.227 ; 119.95,48.2 123.448,44.702 ; 119.95,48.2 124.2,52.45 123.323,53.327 ; 119.95,56.7 123.323,53.327 ; 119.95,65.2 123.148,62.002
  Bottom Layer w0.3: 59,73.45 59,73.871 58.65,74.221 58.65,75.461 58.855,75.666 59.545,75.666 59.711,75.5 63.8,75.5 ; 64.1,76.5 63.8,76.2 63.8,75.5 ; J1.20@65.6,77.441 65.6,77.9 65.816,78.116 66.558,78.116 66.8,77.874 J1.24@66.8,77.441 ; 67.407,72.943 66.489,73.861 66.489,74.217 66.5,74.228 J1.23@66.5,74.566 J1.21@65.9,74.566 J1.19@65.3,74.566 J1.17@64.7,74.566 J1.15@64.1,74.566 64.1,75.2 63.8,75.5 ; 69.35,72.6 76.2,72.6 76.4,72.8 77,73.4
TP-SENS-RX0: C16.RX_ROW J1.25 | length 30.7
  Bottom Layer w0.13: v1(4.406,73.695) v1(6.056,73.695) ; v1(12.86,73.676) v1(14.51,73.676) ; v1(21.36,73.676) v1(23.01,73.676) ; v1(29.91,73.676) v1(31.56,73.676) ; v1(38.35,73.7) v1(40,73.7) ; v1(46.85,73.7) v1(48.5,73.7) ; v1(55.4,73.7) v1(57.05,73.7) ; v1(63.9,73.7) v1(65.5,73.7) ; J1.25@67.1,74.566 67.1,73.963 67.263,73.8 69.15,73.8 69.25,73.7 v1(72.35,73.7) v1(74,73.7) ; v1(80.9,73.7) v1(82.55,73.7) ; v1(89.35,73.7) v1(91,73.7) ; v1(97.85,73.7) v1(99.5,73.7) ; v1(106.4,73.7) 106.401,73.699 108.08,73.699 v1(108.081,73.697) ; v1(114.85,73.7) v1(116.5,73.7) ; v1@123.334,73.684 v1(123.35,73.7) v1(125.018,73.7)
TP-SENS-RX1: C17.RX_ROW J1.33 | length 95
  Bottom Layer w0.13: v1(4.35,65.2) v1(6,65.2) ; v1(12.804,65.18) v1(14.454,65.18) ; v1(21.304,65.18) v1(22.954,65.18) ; v1(29.854,65.18) v1(31.504,65.18) ; v1(38.294,65.205) v1(39.944,65.205) ; v1(46.794,65.205) v1(48.444,65.205) ; v1(55.344,65.205) v1(56.994,65.205) ; v1(63.794,65.205) v1(65.444,65.205) ; J1.33@69.5,74.566 69.5,74.033 69.576,73.957 70.366,73.957 70.665,74.256 70.665,76.015 71.05,76.4 124.39,76.4 126.566,74.224 126.566,66.827 v1(124.944,65.205) v1(123.294,65.205) ; v1(72.294,65.205) v1(73.944,65.205) ; v1(80.844,65.205) v1(82.494,65.205) ; v1(89.294,65.205) v1(90.944,65.205) ; v1(97.794,65.205) v1(99.444,65.205) ; v1(106.344,65.205) v1(107.994,65.205) ; v1(114.794,65.205) v1(116.444,65.205)
TP-SENS-RX2: C18.RX_ROW J1.31 | length 103.7
  Bottom Layer w0.13: v1(4.35,56.7) v1(6,56.7) ; v1(12.804,56.68) v1(14.454,56.68) ; v1(21.304,56.68) v1(22.954,56.68) ; v1(29.854,56.68) v1(31.504,56.68) ; v1(38.294,56.705) v1(39.944,56.705) ; v1(46.794,56.705) v1(48.444,56.705) ; v1(55.344,56.705) v1(56.994,56.705) ; v1(63.794,56.705) v1(65.444,56.705) ; J1.31@68.9,74.566 68.876,74.59 68.876,75.574 68.952,75.65 69.904,75.65 70.911,76.657 124.496,76.657 126.823,74.33 126.823,58.373 125.245,56.795 125.034,56.795 v1(124.944,56.705) v1(123.294,56.705) ; v1(72.294,56.705) v1(73.944,56.705) ; v1(80.844,56.705) v1(82.494,56.705) ; v1(89.294,56.705) v1(90.944,56.705) ; v1(97.794,56.705) v1(99.444,56.705) ; v1(106.344,56.705) v1(107.994,56.705) ; v1(114.794,56.705) v1(116.444,56.705)
TP-SENS-RX3: C19.RX_ROW J1.29 | length 113.6
  Bottom Layer w0.13: v1(4.35,48.2) v1(6,48.2) ; v1(12.804,48.18) v1(14.454,48.18) ; v1(21.304,48.18) v1(22.954,48.18) ; v1(29.854,48.18) v1(31.504,48.18) ; v1(38.294,48.205) v1(39.944,48.205) ; v1(46.794,48.205) v1(48.444,48.205) ; v1(55.344,48.205) v1(56.994,48.205) ; v1(63.794,48.205) v1(65.444,48.205) ; J1.29@68.3,74.566 68.3,75.853 68.376,75.929 69.819,75.929 70.804,76.914 124.603,76.914 127.08,74.437 127.08,50.08 125.294,48.294 125.033,48.294 v1(124.944,48.205) v1(123.294,48.205) ; v1(72.294,48.205) v1(73.944,48.205) ; v1(80.844,48.205) v1(82.494,48.205) ; v1@89.294,48.205 v1(90.944,48.205) ; v1(97.794,48.205) v1(99.444,48.205) ; v1(106.344,48.205) v1(107.994,48.205) ; v1(114.794,48.205) v1(116.444,48.205)
  other v1: 89.35,48.199
TP-SENS-RX4: C20.RX_ROW J1.27 | length 123.3
  Bottom Layer w0.13: v1(4.3,39.7) v1(5.95,39.7) ; v1(12.754,39.68) v1(14.404,39.68) ; v1(21.254,39.68) v1(22.904,39.68) ; v1(29.804,39.68) v1(31.454,39.68) ; v1(38.244,39.705) v1(39.894,39.705) ; v1(46.744,39.705) v1(48.394,39.705) ; v1(55.294,39.705) v1(56.944,39.705) ; v1(63.744,39.705) v1(65.394,39.705) ; J1.27@67.7,74.566 67.7,75.9 67.986,76.186 69.713,76.186 70.698,77.171 124.709,77.171 127.337,74.543 127.337,41.987 v1(125.05,39.7) 123.248,39.7 v1(123.244,39.705) ; v1(72.244,39.705) v1(73.894,39.705) ; v1(80.794,39.705) v1(82.444,39.705) ; v1(89.244,39.705) v1(90.894,39.705) ; v1(97.744,39.705) v1(99.394,39.705) ; v1(106.294,39.705) v1(107.944,39.705) ; v1(114.744,39.705) v1(116.394,39.705)
TP-SENS-RX5: C21.RX_ROW J1.26 | length 131.9
  Bottom Layer w0.13: v1(4.35,31.2) v1(6,31.2) ; v1(12.804,31.18) v1(14.454,31.18) ; v1(21.304,31.18) v1(22.954,31.18) ; v1(29.854,31.18) v1(31.504,31.18) ; v1(38.294,31.205) v1(39.944,31.205) ; v1(46.794,31.205) v1(48.444,31.205) ; v1(55.344,31.205) v1(56.994,31.205) ; v1(63.794,31.205) v1(65.444,31.205) ; J1.26@67.4,77.441 67.414,77.427 67.414,76.736 67.707,76.443 69.606,76.443 70.591,77.428 124.816,77.428 127.594,74.65 127.594,33.855 v1(124.944,31.205) v1(123.294,31.205) ; v1(72.294,31.205) v1(73.944,31.205) ; v1(80.844,31.205) v1(82.494,31.205) ; v1(89.294,31.205) v1(90.944,31.205) ; v1(97.794,31.205) v1(99.444,31.205) ; v1(106.344,31.205) v1(107.994,31.205) ; v1(114.794,31.205) v1(116.444,31.205)
TP-SENS-RX6: C22.RX_ROW J1.28 | length 140.3
  Bottom Layer w0.13: v1(4.35,22.7) v1(6,22.7) ; v1(12.804,22.68) v1(14.454,22.68) ; v1(21.304,22.68) v1(22.954,22.68) ; v1(29.854,22.68) v1(31.504,22.68) ; v1(38.294,22.705) v1(39.944,22.705) ; v1(46.794,22.705) v1(48.444,22.705) ; v1(55.344,22.705) v1(56.994,22.705) ; v1(63.794,22.705) v1(65.444,22.705) ; J1.28@68,77.441 68,76.9 68.2,76.7 69.5,76.7 70.485,77.685 124.922,77.685 127.851,74.756 127.851,25.301 125.319,22.769 125.008,22.769 v1(124.944,22.705) v1(123.294,22.705) ; v1(72.294,22.705) v1(73.944,22.705) ; v1(80.844,22.705) v1(82.494,22.705) ; v1(89.294,22.705) v1(90.944,22.705) ; v1(97.794,22.705) v1(99.444,22.705) ; v1(106.344,22.705) v1(107.994,22.705) ; v1(114.794,22.705) v1(116.444,22.705)
TP-SENS-RX7: C23.RX_ROW J1.32 | length 147.4
  Bottom Layer w0.13: v1(4.35,14.2) v1(6,14.2) ; v1(12.804,14.18) v1(14.454,14.18) ; v1(21.304,14.18) v1(22.954,14.18) ; v1(29.854,14.18) v1(31.504,14.18) ; v1(38.294,14.205) v1(39.944,14.205) ; v1(46.794,14.205) v1(48.444,14.205) ; v1(55.344,14.205) v1(56.994,14.205) ; v1(63.794,14.205) v1(65.444,14.205) ; J1.32@69.2,77.441 69.249,77.49 69.249,77.883 69.325,77.959 125.012,77.959 128.108,74.863 128.108,17.369 v1(124.944,14.205) v1(123.294,14.205) ; v1(72.294,14.205) v1(73.944,14.205) ; v1(80.844,14.205) v1(82.494,14.205) ; v1(89.294,14.205) v1(90.944,14.205) ; v1(97.794,14.205) v1(99.444,14.205) ; v1(106.344,14.205) v1(107.994,14.205) ; v1(114.794,14.205) v1(116.444,14.205)
TP-SENS-RX8: C24.RX_ROW J1.30 SW_SNAP.1 | length 163.1
  Bottom Layer w0.13: v1(4.35,5.7) v1(6,5.7) ; v1(12.804,5.68) v1(14.454,5.68) ; v1(21.304,5.68) v1(22.954,5.68) ; v1(29.854,5.68) v1(31.504,5.68) ; v1(38.294,5.705) v1(39.944,5.705) ; v1(46.794,5.705) v1(48.444,5.705) ; v1(55.344,5.705) v1(56.994,5.705) ; v1(63.794,5.705) 64.619,5.705 ; SW_SNAP.1@64.7,7.492 64.7,5.786 64.619,5.705 ; v1(65.444,5.705) 64.619,5.705 ; J1.30@68.6,77.441 68.6,78.123 68.693,78.216 125.118,78.216 128.365,74.969 128.365,9.126 v1(124.944,5.705) v1(123.294,5.705) ; v1(72.294,5.705) v1(73.944,5.705) ; v1(80.844,5.705) v1(82.494,5.705) ; v1(89.294,5.705) v1(90.944,5.705) ; v1(97.794,5.705) v1(99.444,5.705) ; v1(106.344,5.705) v1(107.994,5.705) ; v1(114.794,5.705) v1(116.444,5.705)
  Bottom Layer w0.2: SW_SNAP.1@64.7,7.492 65.591,7.492 65.908,7.809 66.845,8.746 67.162,9.063 67.162,9.954
TP-SENS-TX0: C1.TX_CLM J1.14 | length 75.4
  Top Layer w0.13: 5.184,38.737 5.184,40.387 ; 5.191,4.544 5.191,6.194 ; 5.198,47.247 5.198,48.897 ; 5.2,64.382 5.2,66.032 ; 5.2,72.9 5.2,74.55 ; 5.202,55.825 5.202,57.475 ; 5.212,13.245 5.212,14.895 ; 5.212,21.838 5.212,23.488 ; 5.212,30.292 5.212,31.942
  Bottom Layer w0.13: v1(5.2,75.25) 8.175,78.225 59.771,78.225 59.834,78.288 63.562,78.288 63.8,78.05 J1.14@63.8,77.441
TP-SENS-TX1: C2.TX_CLM J1.12 | length 66
  Top Layer w0.13: 13.693,38.943 13.693,40.593 ; 13.7,4.9 13.7,6.55 ; 13.7,13.4 13.7,15.05 ; 13.707,47.452 13.707,49.102 ; 13.709,64.587 13.709,66.237 ; 13.709,73.106 13.709,74.756 ; 13.712,56.031 13.712,57.681 ; 13.721,22.043 13.721,23.693 ; 13.721,30.498 13.721,32.148
  Bottom Layer w0.13: v1(13.7,75.25) 16.415,77.965 32.738,77.965 32.741,77.968 59.877,77.968 59.94,78.031 63.021,78.031 63.167,77.885 63.167,77.474 J1.12@63.2,77.441
TP-SENS-TX2: C3.TX_CLM J1.2 | length 54
  Top Layer w0.13: 22.193,39.043 22.193,40.693 ; 22.2,4.85 22.2,6.5 ; 22.2,13.5 22.2,15.15 ; 22.207,47.552 22.207,49.202 ; 22.209,64.687 22.209,66.337 ; 22.209,73.206 22.209,74.856 ; 22.212,56.131 22.212,57.781 ; 22.221,22.143 22.221,23.793 ; 22.221,30.598 22.221,32.248
  Bottom Layer w0.13: v1(22.2,75.25) 24.576,77.626 60.115,77.626 60.2,77.541 J1.2@60.2,77.441
TP-SENS-TX3: C4.TX_CLM J1.4 | length 46.6
  Top Layer w0.13: 30.693,39.093 30.693,40.743 ; 30.7,4.9 30.7,6.55 ; 30.7,13.5 30.7,15.15 ; 30.707,47.602 30.707,49.252 ; 30.709,64.737 30.709,66.387 ; 30.709,73.256 v1@30.709,74.906 ; 30.712,56.181 30.712,57.831 ; 30.721,22.193 30.721,23.843 ; 30.721,30.648 30.721,32.298
  Bottom Layer w0.13: v1(30.7,75.2) 32.869,77.369 59.422,77.369 59.94,76.851 60.659,76.851 60.8,76.993 J1.4@60.8,77.441
TP-SENS-TX4: C5.TX_CLM J1.6 | length 38.9
  Top Layer w0.13: 39.193,39.093 39.193,40.743 ; 39.2,4.9 39.2,6.55 ; 39.2,13.55 39.2,15.2 ; 39.207,47.602 39.207,49.252 ; 39.209,64.737 39.209,66.387 ; 39.209,73.256 v1@39.209,74.906 ; 39.212,56.181 39.212,57.831 ; 39.221,22.193 39.221,23.843 ; 39.221,30.648 39.221,32.298
  Bottom Layer w0.13: v1(39.2,75.1) 41.212,77.112 59.316,77.112 59.834,76.594 61.324,76.594 61.4,76.67 J1.6@61.4,77.441
TP-SENS-TX5: C6.TX_CLM J1.8 | length 31
  Top Layer w0.13: 47.693,39.143 47.693,40.793 ; 47.7,4.95 47.7,6.6 ; 47.7,13.65 47.7,15.3 ; 47.707,47.652 47.707,49.302 ; 47.709,64.787 47.709,66.437 ; 47.709,73.306 v1@47.709,74.956 ; 47.712,56.231 47.712,57.881 ; 47.721,22.243 47.721,23.893 ; 47.721,30.698 47.721,32.348
  Bottom Layer w0.13: v1(47.75,75.25) 49.355,76.855 59.209,76.855 59.727,76.337 61.787,76.337 62,76.55 J1.8@62,77.441
TP-SENS-TX6: C7.TX_CLM J1.10 | length 23.2
  Top Layer w0.13: 56.193,39.093 56.193,40.743 ; 56.2,4.9 56.2,6.55 ; 56.2,13.55 56.2,15.2 ; 56.207,47.602 56.207,49.252 ; 56.209,64.737 56.209,66.387 ; 56.209,73.256 v1@56.209,74.906 ; 56.212,56.181 56.212,57.831 ; 56.221,22.193 56.221,23.843 ; 56.221,30.648 56.221,32.298
  Bottom Layer w0.13: v1(56.2,75.2) 57.598,76.598 59.103,76.598 59.621,76.08 62.23,76.08 62.6,76.45 J1.10@62.6,77.441
TP-SENS-TX7: C8.TX_CLM J1.22 SW_SNAP.2 | length 17.8
  Top Layer w0.13: 64.693,39.043 64.693,40.693 ; 64.7,4.85 64.7,6.5 ; 64.7,13.5 64.7,15.15 ; 64.707,47.552 64.707,49.202 ; 64.709,64.687 64.709,66.337 ; 64.709,73.206 64.709,74.856 ; 64.712,56.131 64.712,57.781 ; 64.721,22.143 64.721,23.793 ; 64.721,30.598 64.721,32.248
  Bottom Layer w0.13: v1(64.615,75.677) 64.638,75.7 65.55,75.7 66.2,76.35 J1.22@66.2,77.441
  other v3: 64.7,9.954
TP-SENS-TX8: C9.TX_CLM J1.1 | length 31.6
  Top Layer w0.13: 73.193,39.043 73.193,40.693 ; 73.2,4.85 73.2,6.5 ; 73.2,13.55 73.2,15.2 ; 73.207,47.552 73.207,49.202 ; 73.209,64.687 73.209,66.337 ; 73.209,73.206 73.209,74.856 ; 73.212,56.131 73.212,57.781 ; 73.221,22.143 73.221,23.793 ; 73.221,30.598 73.221,32.248
  Bottom Layer w0.13: J1.1@59.9,74.566 59.9,73.6 62.378,71.122 64.178,71.122 66.607,68.693 71.27,68.693 72.41,69.833 v1(73.15,69.833)
TP-SENS-TX9: C10.TX_CLM J1.3 | length 40.9
  Top Layer w0.13: 81.693,39.093 81.693,40.743 ; 81.7,4.9 81.7,6.55 ; 81.7,13.6 81.7,15.25 ; 81.707,47.602 81.707,49.252 ; 81.709,64.737 81.709,66.387 ; 81.709,73.256 81.709,74.906 ; 81.712,56.181 81.712,57.831 ; 81.721,22.193 81.721,23.843 ; 81.721,30.648 81.721,32.298
  Bottom Layer w0.13: J1.3@60.5,74.566 60.5,73.363 62.484,71.379 64.284,71.379 66.713,68.95 71.15,68.95 71.848,69.648 71.862,69.648 72.956,70.743 73.194,70.743 74.337,69.6 74.35,69.6 75.085,68.865 79.782,68.865 80.231,69.314 81.379,69.314 81.641,69.576 v1(81.69,69.576)
TP-SENS-TX10: C11.TX_CLM J1.5 | length 50.4
  Top Layer w0.13: 90.193,39.143 90.193,40.793 ; 90.2,4.95 90.2,6.6 ; 90.2,72.617 90.2,74.3 ; 90.207,47.652 90.207,49.302 ; 90.209,64.787 90.209,66.437 ; 90.212,56.231 90.212,57.881 ; 90.221,13.651 90.221,15.301 ; 90.221,22.243 90.221,23.893 ; 90.221,30.698 90.221,32.348
  Bottom Layer w0.13: J1.5@61.1,74.566 61.1,73.127 62.591,71.636 64.391,71.636 66.82,69.207 71.044,69.207 71.927,70.09 71.94,70.09 72.85,71 73.3,71 74.443,69.857 74.456,69.857 75.191,69.122 79.676,69.122 81.454,70.9 82,70.9 83.9,69 89.683,69 v1(90.252,69.569)
TP-SENS-TX11: C12.TX_CLM J1.7 | length 60.2
  Top Layer w0.13: 98.693,39.193 98.693,40.843 ; 98.7,5 98.7,6.65 ; v1(98.7,75.048) 98.709,75.039 98.709,73.356 ; 98.707,47.702 98.707,49.352 ; 98.709,64.837 98.709,66.487 ; 98.712,56.281 98.712,57.931 ; 98.721,13.701 98.721,15.351 ; 98.721,22.293 98.721,23.943 ; 98.721,30.748 98.721,32.398
  Bottom Layer w0.13: J1.7@61.7,74.566 61.7,73 62.807,71.893 64.497,71.893 66.926,69.464 70.937,69.464 71.82,70.347 71.834,70.347 72.887,71.4 73.263,71.4 74.549,70.114 74.563,70.114 75.298,69.379 79.569,69.379 81.44,71.25 82,71.25 82.093,71.157 82.106,71.157 83.984,69.279 88.219,69.279 90.16,71.219 90.267,71.219 92.487,69 98.333,69 v1(98.802,69.469)
TP-SENS-TX12: C13.TX_CLM J1.9 | length 70.2
  Top Layer w0.13: 107.193,39.193 107.193,40.843 ; 107.2,5 107.2,6.65 ; 107.2,13.6 107.2,15.25 ; 107.207,47.702 107.207,49.352 ; 107.209,64.837 107.209,66.487 ; 107.212,56.281 107.212,57.931 ; 107.221,22.293 107.221,23.943 ; 107.221,30.748 107.221,32.398 ; 107.232,72.725 107.232,74.375
  Bottom Layer w0.13: J1.9@62.3,74.566 62.3,72.763 62.913,72.15 64.604,72.15 67.033,69.721 70.831,69.721 71.714,70.604 71.727,70.604 72.837,71.714 73.313,71.714 74.656,70.371 74.669,70.371 75.404,69.636 79.463,69.636 81.513,71.686 81.937,71.686 82.209,71.414 82.213,71.414 84.091,69.536 88.113,69.536 90.053,71.476 90.374,71.476 92.593,69.257 96.134,69.257 98.527,71.65 98.9,71.65 101.314,69.236 104.349,69.236 104.633,69.519 v1(107.302,69.519)
TP-SENS-TX13: C14.TX_CLM J1.11 | length 80.4
  Top Layer w0.13: 115.693,39.093 115.693,40.743 ; 115.7,4.9 115.7,6.55 ; 115.7,13.5 115.7,15.15 ; 115.707,47.602 115.707,49.252 ; 115.709,64.737 115.709,66.387 ; 115.709,73.256 115.709,74.906 ; 115.712,56.181 115.712,57.831 ; 115.721,22.193 115.721,23.843 ; 115.721,30.648 115.721,32.298
  Bottom Layer w0.13: J1.11@62.9,74.566 62.9,74 62.65,73.75 62.65,72.777 63.02,72.407 64.71,72.407 67.139,69.978 70.724,69.978 71.607,70.861 71.621,70.861 72.731,71.971 73.419,71.971 74.762,70.628 74.776,70.628 75.511,69.893 79.356,69.893 81.406,71.943 82.044,71.943 82.316,71.671 82.319,71.671 84.197,69.793 88.006,69.793 90.127,71.914 90.299,71.914 90.613,71.6 90.637,71.6 91.45,70.787 91.45,70.763 92.699,69.514 96.027,69.514 98.42,71.907 99.006,71.907 101.42,69.493 104.243,69.493 106.7,71.95 107.85,71.95 110.407,69.393 112.606,69.393 112.683,69.469 v1(115.752,69.469)
TP-SENS-TX14: C15.TX_CLM J1.13 | length 91.3
  Top Layer w0.13: 124.188,72.809 124.188,74.965 ; 124.193,39.143 124.193,40.793 ; 124.2,4.95 124.2,6.6 ; 124.2,13.55 124.2,15.2 ; 124.207,47.652 124.207,49.302 ; 124.209,64.787 124.209,66.437 ; 124.212,56.231 124.212,57.881 ; 124.221,22.243 124.221,23.893 ; 124.221,30.698 124.221,32.348
  Bottom Layer w0.13: J1.13@63.5,74.566 63.415,74.481 63.415,74.115 62.907,73.607 62.907,72.883 63.126,72.664 64.817,72.664 67.246,70.235 70.618,70.235 71.501,71.118 71.514,71.118 72.624,72.228 73.526,72.228 74.869,70.885 74.882,70.885 75.617,70.15 79.25,70.15 81.3,72.2 82.15,72.2 82.422,71.928 82.426,71.928 84.304,70.05 87.9,70.05 90.021,72.171 90.406,72.171 90.677,71.9 90.7,71.9 92.829,69.771 95.921,69.771 98.314,72.164 99.113,72.164 101.527,69.75 104.137,69.75 106.594,72.207 107.956,72.207 110.513,69.65 112.5,69.65 115.05,72.2 116.4,72.2 119.081,69.519 v1(124.252,69.519)
pads on no net: J1.MT

## Polygon pours and split planes (outlines as drawn)
TP-SENS-TX7 on Top Layer "NONET_L04_P-001" (solid, pour order 221): 64.701,73.4 60.751,69.451 60.751,69.449 60.752,69.449 64.701,65.5 68.65,69.449 68.651,69.449
TP-SENS-TX14 on Top Layer "NONET_L04_P-001" (solid, pour order 291): 124.201,73.4 120.251,69.451 120.251,69.449 120.252,69.449 124.201,65.5 128.15,69.449 128.151,69.449
TP-SENS-TX13 on Top Layer "NONET_L04_P-001" (solid, pour order 281): 115.701,73.4 111.751,69.451 111.751,69.449 111.752,69.449 115.701,65.5 119.65,69.449 119.651,69.449
TP-SENS-TX10 on Top Layer "NONET_L04_P-001" (solid, pour order 251): 90.201,73.4 86.251,69.451 86.251,69.449 86.252,69.449 90.201,65.5 94.15,69.449 94.151,69.449
TP-SENS-TX9 on Top Layer "NONET_L04_P-001" (solid, pour order 242): 81.701,64.901 77.751,60.952 77.751,60.95 77.752,60.95 81.701,57.001 85.65,60.95 85.651,60.95
TP-SENS-TX7 on Top Layer "NONET_L04_P-001" (solid, pour order 228): 64.701,13.901 60.751,9.952 60.751,9.95 60.752,9.95 64.701,6.001 68.65,9.95 68.651,9.95
TP-SENS-TX6 on Top Layer "NONET_L04_P-001" (solid, pour order 218): 56.201,13.901 52.251,9.952 52.251,9.95 52.252,9.95 56.201,6.001 60.15,9.95 60.151,9.95
TP-SENS-RX8 on Top Layer "NONET_L04_P-001" (solid, pour order 153): 64.999,5.699 68.948,1.749 68.95,1.749 72.899,5.699 68.95,9.648 68.95,9.649
TP-SENS-RX8 on Top Layer "NONET_L04_P-001" (solid, pour order 152): 56.499,5.699 60.448,1.749 60.45,1.749 64.399,5.699 60.45,9.648 60.45,9.649
TP-SENS-RX7 on Top Layer "NONET_L04_P-001" (solid, pour order 137): 64.999,14.199 68.948,10.249 68.95,10.249 72.899,14.199 68.95,18.148 68.95,18.149
TP-SENS-RX7 on Top Layer "NONET_L04_P-001" (solid, pour order 136): 56.499,14.199 60.448,10.249 60.45,10.249 64.399,14.199 60.45,18.148 60.45,18.149
TP-SENS-TX9 on Top Layer "NONET_L04_P-001" (solid, pour order 250): 77.742,1.421 81.69,5.369 81.693,5.369 85.642,1.42
TP-SENS-TX14 on Top Layer "NONET_L04_P-001" (solid, pour order 299): 120.251,77.949 124.2,74 124.202,74 128.151,77.949
TP-SENS-RX0 on Top Layer "NONET_L04_P-001" (solid, pour order 32): 128.449,77.649 124.5,73.7 124.5,73.698 128.449,69.749
TP-SENS-RX8 on Top Layer "NONET_L04_P-001" (solid, pour order 145): 0.951,1.749 4.9,5.698 4.9,5.7 0.951,9.649
TP-SENS-TX0 on Top Layer "NONET_L04_P-001" (solid, pour order 15): 1.241,1.421 5.189,5.369 5.192,5.369 9.141,1.42
TP-SENS-TX14 on Top Layer "NONET_L04_P-001" (solid, pour order 300): 120.242,1.421 124.19,5.369 124.193,5.369 128.142,1.42
TP-SENS-RX8 on Top Layer "NONET_L04_P-001" (solid, pour order 160): 128.449,9.648 124.5,5.699 124.5,5.696 128.449,1.748
TP-SENS-RX2 on Top Layer "NONET_L04_P-001" (solid, pour order 59): 81.999,56.699 85.948,52.749 85.95,52.749 89.899,56.699 85.95,60.648 85.95,60.649
TP-SENS-RX1 on Top Layer "NONET_L04_P-001" (solid, pour order 43): 81.999,65.199 85.948,61.249 85.95,61.249 89.899,65.199 85.95,69.148 85.95,69.149
TP-SENS-RX4 on Top Layer "NONET_L04_P-001" (solid, pour order 96): 128.449,43.648 124.5,39.699 124.5,39.696 128.449,35.748
TP-SENS-RX3 on Top Layer "NONET_L04_P-001" (solid, pour order 75): 81.999,48.199 85.948,44.249 85.95,44.249 89.899,48.199 85.95,52.148 85.95,52.149
TP-SENS-TX14 on Top Layer "NONET_L04_P-001" (solid, pour order 298): 124.201,13.901 120.251,9.952 120.251,9.95 120.252,9.95 124.201,6.001 128.15,9.95 128.151,9.95
TP-SENS-TX14 on Top Layer "NONET_L04_P-001" (solid, pour order 297): 124.201,22.401 120.251,18.452 120.251,18.45 120.252,18.45 124.201,14.501 128.15,18.45 128.151,18.45
TP-SENS-TX14 on Top Layer "NONET_L04_P-001" (solid, pour order 296): 124.201,30.901 120.251,26.952 120.251,26.95 120.252,26.95 124.201,23.001 128.15,26.95 128.151,26.95
TP-SENS-TX14 on Top Layer "NONET_L04_P-001" (solid, pour order 295): 124.201,39.401 120.251,35.452 120.251,35.45 120.252,35.45 124.201,31.501 128.15,35.45 128.151,35.45
TP-SENS-TX14 on Top Layer "NONET_L04_P-001" (solid, pour order 294): 124.201,47.901 120.251,43.952 120.251,43.95 120.252,43.95 124.201,40.001 128.15,43.95 128.151,43.95
TP-SENS-TX14 on Top Layer "NONET_L04_P-001" (solid, pour order 293): 124.201,56.401 120.251,52.452 120.251,52.45 120.252,52.45 124.201,48.501 128.15,52.45 128.151,52.45
TP-SENS-TX14 on Top Layer "NONET_L04_P-001" (solid, pour order 292): 124.201,64.901 120.251,60.952 120.251,60.95 120.252,60.95 124.201,57.001 128.15,60.95 128.151,60.95
TP-SENS-TX13 on Top Layer "NONET_L04_P-001" (solid, pour order 290): 111.742,1.421 115.69,5.369 115.693,5.369 119.642,1.42
TP-SENS-TX13 on Top Layer "NONET_L04_P-001" (solid, pour order 289): 111.751,77.949 115.7,74 115.702,74 119.651,77.949
TP-SENS-TX13 on Top Layer "NONET_L04_P-001" (solid, pour order 288): 115.701,13.901 111.751,9.952 111.751,9.95 111.752,9.95 115.701,6.001 119.65,9.95 119.651,9.95
TP-SENS-TX13 on Top Layer "NONET_L04_P-001" (solid, pour order 287): 115.701,22.401 111.751,18.452 111.751,18.45 111.752,18.45 115.701,14.501 119.65,18.45 119.651,18.45
TP-SENS-TX13 on Top Layer "NONET_L04_P-001" (solid, pour order 286): 115.701,30.901 111.751,26.952 111.751,26.95 111.752,26.95 115.701,23.001 119.65,26.95 119.651,26.95
TP-SENS-TX13 on Top Layer "NONET_L04_P-001" (solid, pour order 285): 115.701,39.401 111.751,35.452 111.751,35.45 111.752,35.45 115.701,31.501 119.65,35.45 119.651,35.45
TP-SENS-TX13 on Top Layer "NONET_L04_P-001" (solid, pour order 284): 115.701,47.901 111.751,43.952 111.751,43.95 111.752,43.95 115.701,40.001 119.65,43.95 119.651,43.95
TP-SENS-TX13 on Top Layer "NONET_L04_P-001" (solid, pour order 283): 115.701,56.401 111.751,52.452 111.751,52.45 111.752,52.45 115.701,48.501 119.65,52.45 119.651,52.45
TP-SENS-TX13 on Top Layer "NONET_L04_P-001" (solid, pour order 282): 115.701,64.901 111.751,60.952 111.751,60.95 111.752,60.95 115.701,57.001 119.65,60.95 119.651,60.95
TP-SENS-TX12 on Top Layer "NONET_L04_P-001" (solid, pour order 280): 103.242,1.421 107.19,5.369 107.193,5.369 111.142,1.42
TP-SENS-TX12 on Top Layer "NONET_L04_P-001" (solid, pour order 279): 103.251,77.949 107.2,74 107.202,74 111.151,77.949
TP-SENS-TX12 on Top Layer "NONET_L04_P-001" (solid, pour order 278): 107.201,13.901 103.251,9.952 103.251,9.95 103.252,9.95 107.201,6.001 111.15,9.95 111.151,9.95
TP-SENS-TX12 on Top Layer "NONET_L04_P-001" (solid, pour order 277): 107.201,22.401 103.251,18.452 103.251,18.45 103.252,18.45 107.201,14.501 111.15,18.45 111.151,18.45
TP-SENS-TX12 on Top Layer "NONET_L04_P-001" (solid, pour order 276): 107.201,30.901 103.251,26.952 103.251,26.95 103.252,26.95 107.201,23.001 111.15,26.95 111.151,26.95
TP-SENS-TX12 on Top Layer "NONET_L04_P-001" (solid, pour order 275): 107.201,39.401 103.251,35.452 103.251,35.45 103.252,35.45 107.201,31.501 111.15,35.45 111.151,35.45
TP-SENS-TX12 on Top Layer "NONET_L04_P-001" (solid, pour order 274): 107.201,47.901 103.251,43.952 103.251,43.95 103.252,43.95 107.201,40.001 111.15,43.95 111.151,43.95
TP-SENS-TX12 on Top Layer "NONET_L04_P-001" (solid, pour order 273): 107.201,56.401 103.251,52.452 103.251,52.45 103.252,52.45 107.201,48.501 111.15,52.45 111.151,52.45
TP-SENS-TX12 on Top Layer "NONET_L04_P-001" (solid, pour order 272): 107.201,64.901 103.251,60.952 103.251,60.95 103.252,60.95 107.201,57.001 111.15,60.95 111.151,60.95
TP-SENS-TX12 on Top Layer "NONET_L04_P-001" (solid, pour order 271): 107.201,73.4 103.251,69.451 103.251,69.449 103.252,69.449 107.201,65.5 111.15,69.449 111.151,69.449
TP-SENS-TX11 on Top Layer "NONET_L04_P-001" (solid, pour order 270): 94.742,1.421 98.69,5.369 98.693,5.369 102.642,1.42
TP-SENS-TX11 on Top Layer "NONET_L04_P-001" (solid, pour order 269): 94.751,77.949 98.7,74 98.702,74 102.651,77.949
TP-SENS-TX11 on Top Layer "NONET_L04_P-001" (solid, pour order 268): 98.701,13.901 94.751,9.952 94.751,9.95 94.752,9.95 98.701,6.001 102.65,9.95 102.651,9.95
TP-SENS-TX11 on Top Layer "NONET_L04_P-001" (solid, pour order 267): 98.701,22.401 94.751,18.452 94.751,18.45 94.752,18.45 98.701,14.501 102.65,18.45 102.651,18.45
TP-SENS-TX11 on Top Layer "NONET_L04_P-001" (solid, pour order 266): 98.701,30.901 94.751,26.952 94.751,26.95 94.752,26.95 98.701,23.001 102.65,26.95 102.651,26.95
TP-SENS-TX11 on Top Layer "NONET_L04_P-001" (solid, pour order 265): 98.701,39.401 94.751,35.452 94.751,35.45 94.752,35.45 98.701,31.501 102.65,35.45 102.651,35.45
TP-SENS-TX11 on Top Layer "NONET_L04_P-001" (solid, pour order 264): 98.701,47.901 94.751,43.952 94.751,43.95 94.752,43.95 98.701,40.001 102.65,43.95 102.651,43.95
TP-SENS-TX11 on Top Layer "NONET_L04_P-001" (solid, pour order 263): 98.701,56.401 94.751,52.452 94.751,52.45 94.752,52.45 98.701,48.501 102.65,52.45 102.651,52.45
TP-SENS-TX11 on Top Layer "NONET_L04_P-001" (solid, pour order 262): 98.701,64.901 94.751,60.952 94.751,60.95 94.752,60.95 98.701,57.001 102.65,60.95 102.651,60.95
TP-SENS-TX11 on Top Layer "NONET_L04_P-001" (solid, pour order 261): 98.701,73.4 94.751,69.451 94.751,69.449 94.752,69.449 98.701,65.5 102.65,69.449 102.651,69.449
TP-SENS-TX10 on Top Layer "NONET_L04_P-001" (solid, pour order 260): 86.242,1.421 90.19,5.369 90.193,5.369 94.142,1.42
TP-SENS-TX10 on Top Layer "NONET_L04_P-001" (solid, pour order 259): 86.251,77.949 90.2,74 90.202,74 94.151,77.949
TP-SENS-TX10 on Top Layer "NONET_L04_P-001" (solid, pour order 258): 90.201,13.901 86.251,9.952 86.251,9.95 86.252,9.95 90.201,6.001 94.15,9.95 94.151,9.95
TP-SENS-TX10 on Top Layer "NONET_L04_P-001" (solid, pour order 257): 90.201,22.401 86.251,18.452 86.251,18.45 86.252,18.45 90.201,14.501 94.15,18.45 94.151,18.45
TP-SENS-TX10 on Top Layer "NONET_L04_P-001" (solid, pour order 256): 90.201,30.901 86.251,26.952 86.251,26.95 86.252,26.95 90.201,23.001 94.15,26.95 94.151,26.95
TP-SENS-TX10 on Top Layer "NONET_L04_P-001" (solid, pour order 255): 90.201,39.401 86.251,35.452 86.251,35.45 86.252,35.45 90.201,31.501 94.15,35.45 94.151,35.45
TP-SENS-TX10 on Top Layer "NONET_L04_P-001" (solid, pour order 254): 90.201,47.901 86.251,43.952 86.251,43.95 86.252,43.95 90.201,40.001 94.15,43.95 94.151,43.95
TP-SENS-TX10 on Top Layer "NONET_L04_P-001" (solid, pour order 253): 90.201,56.401 86.251,52.452 86.251,52.45 86.252,52.45 90.201,48.501 94.15,52.45 94.151,52.45